# EAGLE board Wk5CADpcb1 (EAGLE 9.7.0)
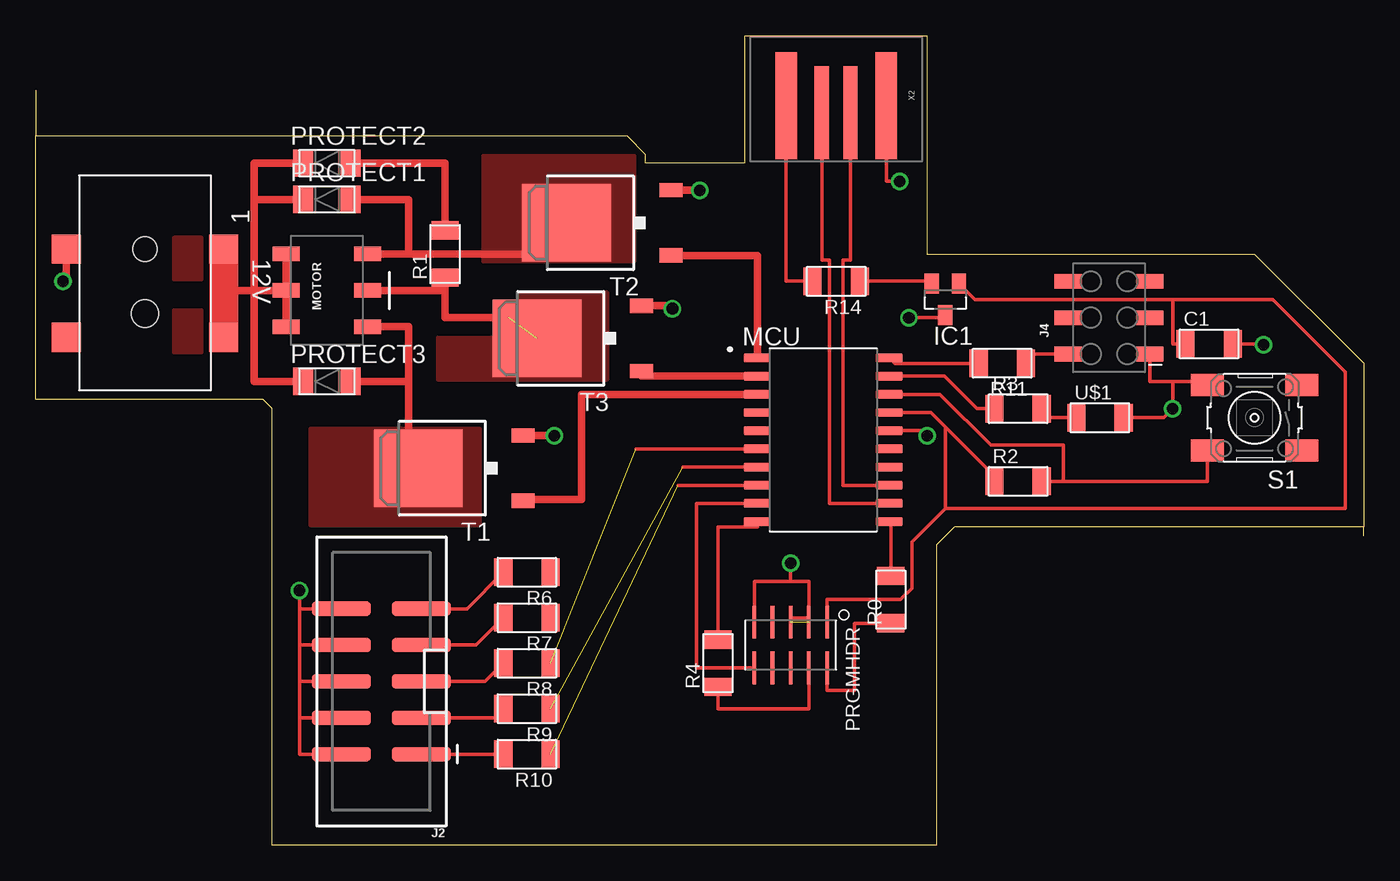
[diagram p0: board, top side]
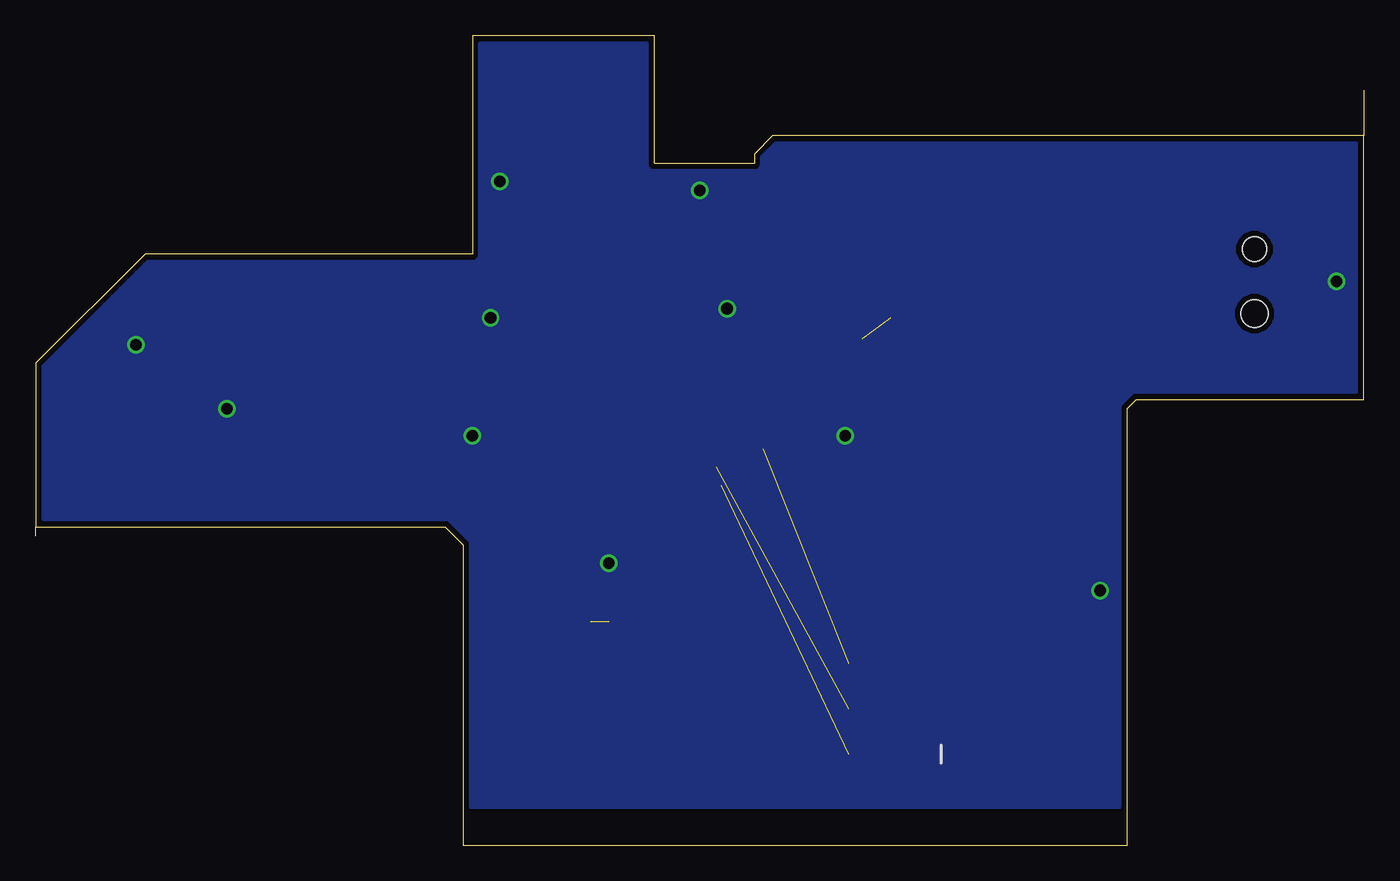
[diagram p1: board, bottom side, seen from below]

Size 92.71 x 56.52 mm. Coordinates in mm from the lower left corner, seen from the top.
Outline: 92.71,22.23 92.71,33.66 85.09,41.28 62.23,41.28 62.23,56.52 49.53,56.52 49.53,47.62 42.55,47.62 42.55,48.26 41.27,49.53 0,49.53
Outline: 92.71,21.59 92.71,22.23
Outline: 92.71,22.23 64.13,22.23 62.87,20.95 62.87,0 16.51,0 16.51,30.48 15.87,31.11 0,31.11 0,49.53
Outline: 0,52.7 0,49.53
Copper layers (1*16): Top 0.035mm / dielectric 1.5mm / Bottom 0.035mm
Design rules "fab": minimum track width 10mil, minimum drill 32mil, track to track 16mil, track to pad 16mil, pad to pad 16mil, via to via 16mil, smd to smd 6mil, copper to edge 16mil, drill to drill 16mil, minimum pad ring 10mil, minimum via ring 8mil, stop-mask expansion 4mil, vias tented up to drill 0mil, thermal gap 16mil

## Footprints (pad centres in the part's own frame; a part is rotated, then mirrored left to right if it is on the bottom)
694108106102 = smd 2.05 x 2.05: 1 -2.25,5.5; 2 -2.25,-5.5; 3 3.9,-5.5; A1 3.9,5.5 | hole 1.7: -2.25,0 | hole 1.9: 2.25,0
C1206FAB = smd 1.27 x 1.905: 1 -1.651,0; 2 1.651,0
SOT23 = smd 1 x 1.4: 1 -0.95,-1.1; 2 0.95,-1.1; 3 0,1.1
2X5-SHROUDED_SMD = smd 4.15 x 1: 1 -2.794,5.08; 2 2.794,5.08; 3 -2.794,2.54; 4 2.794,2.54; 5 -2.794,0; 6 2.794,0; 7 -2.794,-2.54; 8 2.794,-2.54; 9 -2.794,-5.08; 10 2.794,-5.08
2X3_SMD = smd 1.02 x 1.9: 1 -2.54,-2.85; 2 -2.54,2.85; 3 0,-2.85; 4 0,2.85; 5 2.54,-2.85; 6 2.54,2.85
SOIC127P1030X265-20N = smd 1.9 x 0.6: 1 -4.605,5.715; 2 -4.605,4.445; 3 -4.605,3.175; 4 -4.605,1.905; 5 -4.605,0.635; 6 -4.605,-0.635; 7 -4.605,-1.905; 8 -4.605,-3.175; 9 -4.605,-4.445; 10 -4.605,-5.715; 11 4.605,-5.715; 12 4.605,-4.445; 13 4.605,-3.175; 14 4.605,-1.905; 15 4.605,-0.635; 16 4.605,0.635; 17 4.605,1.905; 18 4.605,3.175; 19 4.605,4.445; 20 4.605,5.715
PDI_2X3_SMD = smd 1.02 x 1.9: 1 -2.54,-2.85; 2 -2.54,2.85; 3 0,-2.85; 4 0,2.85; 5 2.54,-2.85; 6 2.54,2.85
2X5_1.27MM_SMD = smd 2.286 x 0.254: 1 -1.6,2.54; 2 1.6,2.54; 3 -1.6,1.27; 4 1.6,1.27; 5 -1.6,0; 6 1.6,0; 7 -1.6,-1.27; 8 1.6,-1.27; 9 -1.6,-2.54; 10 1.6,-2.54
MINI-SMA = smd 1.4 x 1.9: ANODE 1.65,0; KATHODE -1.65,0
R1206FAB = smd 1.27 x 1.905: 1 -1.651,0; 2 1.651,0
6MM_SWITCH = smd 2.286 x 1.524: 1 -3.302,2.286; 2 3.302,2.286; 3 -3.302,-2.286; 4 3.302,-2.286
TO252 = smd 1 x 1.6: 1 -2.28,-4.8; 3 2.28,-4.8 | smd 5.4 x 6.2: 2 0,2.5
LED1206FAB = smd 1.27 x 1.905: 1 -1.651,0; 2 1.651,0
USB-A-PCB = smd 7.5 x 1.5: 5V -0.2,-3.5; GND -0.2,3.5 | smd 6.5 x 1: USB_M 0.3,-1; USB_P 0.3,1

## Placement (x,y rotation side)
12V  [694108106102]  7.62,39.37 270 top
C1  [C1206FAB]  81.91,35 0 top
IC1  [SOT23]  63.5,38.1 180 top
J2  [2X5-SHROUDED_SMD]  24.13,11.43 180 top
J4  [2X3_SMD]  74.93,36.83 90 top
MCU  UC_ATSAMD11D14A-SSUT  [SOIC127P1030X265-20N]  54.97,28.3 0 top
MOTOR  [PDI_2X3_SMD]  20.32,38.73 90 top
PRGMHDR  [2X5_1.27MM_SMD]  52.7,13.97 270 top
PROTECT1  DIODE_SCHOTTKY_CDBM1100-G  [MINI-SMA]  20.32,45.08 0 top
PROTECT2  DIODE_SCHOTTKY_CDBM1100-G  [MINI-SMA]  20.32,47.62 0 top
PROTECT3  DIODE_SCHOTTKY_CDBM1100-G  [MINI-SMA]  20.32,32.39 0 top
R0  0 Ohm  [R1206FAB]  59.69,17.15 90 top
R1  0 Ohm  [R1206FAB]  28.58,41.28 90 top
R2  [R1206FAB]  68.58,25.4 0 top
R3  [R1206FAB]  68.58,30.48 0 top
R4  0 Ohm  [R1206FAB]  47.62,12.7 90 top
R6  [R1206FAB]  34.29,19.05 180 top
R7  [R1206FAB]  34.29,15.88 180 top
R8  [R1206FAB]  34.29,12.7 180 top
R9  [R1206FAB]  34.29,9.52 180 top
R10  [R1206FAB]  34.29,6.35 180 top
R11  [R1206FAB]  67.48,33.66 180 top
R14  [R1206FAB]  55.88,39.37 180 top
S1  [6MM_SWITCH]  85.09,29.84 180 top
T1  [TO252]  29.21,26.32 90 top
T2  [TO252]  39.56,43.45 90 top
T3  [TO252]  37.49,35.38 90 top
U$1  LEDFAB1206  [LED1206FAB]  74.29,29.84 0 top
X2  CONN_USBPCB  [USB-A-PCB]  55.88,51.44 270 top

## Library data of the parts
12V = Connector; CATEGORY: Connector; DESCRIPTION: CONN PWR JACK 2.5X5.5MM SOLDER; MANUFACTURER: Würth Elektronik; MOUNT: SMT; MPN: 694108106102; OPERATING_TEMPERATURE: -40°C to +85°C; PART_STATUS: Active; ROHS_COMPLIANCE: RoHS Compliant; SERIES: WR-DC; SUBCATEGORY: Power Connector; TYPE: Barrel-Right Angled
C1 IC1 MCU PROTECT1-PROTECT3 R0 R1-R4 R6-R11 R14 S1 T1-T3 U$1 X2 = fab
J2 = fab; PROD_ID: CONN-09508
J4 MOTOR = fab; PROD_ID: CONN-11290
PRGMHDR = fab; PACKAGE: 2x5_1.27MM_SMD

## Nets
CLK: PRGMHDR.4 R4.1
COIL1: MOTOR.5 PROTECT1.ANODE T2.2
COIL2: MOTOR.3 R1.1 T3.2
COIL3: MOTOR.1 PROTECT3.ANODE T1.2
GATE1: MCU.1 T2.1
GATE2: MCU.2 T3.1
GATE3: MCU.3 T1.1
GND: 12V.2 C1.2 IC1.3 J2.2 J2.4 J2.6 J2.8 J2.10 J4.1 MCU.16 PRGMHDR.3 PRGMHDR.5 PRGMHDR.9 S1.4 T1.3 T2.3 T3.3 U$1.2 X2.GND
N$1: J4.2 R11.1
N$2: MCU.10 R4.2
N$3: MCU.11 R0.2
N$4: PRGMHDR.2 R0.1
N$5: MCU.13 X2.USB_P
N$6: MCU.12 X2.USB_M
N$7: R14.2 X2.5V
N$8: PROTECT2.ANODE R1.2
N$11: MCU.18 R2.2 S1.2
N$12: MCU.19 R3.1
N$13: R3.2 U$1.1
N$15: J2.9 R6.2
N$16: J2.7 R7.2
N$24: J2.5 R8.2
N$26: J2.3 R9.2
N$28: J2.1 R10.2
N$29: MCU.6 R8.1
N$30: MCU.7 R9.1
N$31: MCU.8 R10.1
N$32: MCU.20 R11.2
N$36: IC1.2 R14.1
RESET: MCU.9 PRGMHDR.10
S$1: R7.1
VCC: 12V.1 12V.A1 MOTOR.2 MOTOR.4 MOTOR.6 PROTECT1.KATHODE PROTECT2.KATHODE PROTECT3.KATHODE
VDD: C1.1 IC1.1 MCU.17 PRGMHDR.1 R2.1

## Tracks (layer width: path | path; a pad name or v marks a point on that pad's centre or on a via)
CLK
  Top 0.254: R4.1 47.62,9.52 53.98,9.52 PRGMHDR.4
COIL1
  Top 0.508: MOTOR.5 26.04,41.28 | 26.04,41.28 26.04,45.08 PROTECT1.ANODE | 26.04,41.28 32.38,41.28 | 32.38,41.28 33.02,41.28 | 32.38,41.28 | 32.38,41.28 36.83,41.28
  pour Top (no thermals): 31.12,40.64 31.12,48.26 41.91,48.26 41.91,40.64
COIL2  (1 unrouted)
  Top 0.508: MOTOR.3 28.58,38.73 | R1.1 28.58,38.73 | 28.58,38.73 28.58,36.83 33.02,36.83
  pour Top (no thermals): 33.66,38.73 40.01,38.73 40.01,32.39 27.94,32.39 27.94,35.56 33.66,35.56
COIL3
  Top 0.508: PROTECT3.ANODE 26.04,32.39 | 26.04,32.39 26.04,36.2 MOTOR.1 | 26.04,32.39 26.04,26.67
  pour Top (no thermals): 29.84,29.21 31.12,29.21 31.12,22.23 31.75,22.23 19.05,22.23 19.05,29.21 31.12,29.21
GATE1
  Top 0.508: T2.1 50.37,41.17 MCU.1
GATE2
  Top 0.508: MCU.2 42.29,32.75 T3.1
GATE3
  Top 0.508: T1.1 34.01,24.13 38.1,24.13 38.1,31.48 MCU.3
GND  (via drill 0.81)  (1 unrouted)
  Top 0.254: J2.2 18.41,6.35 18.41,8.89 | 18.41,8.89 18.41,11.43 | 18.41,11.43 18.41,13.97 | 18.41,13.97 18.41,16.51 | 18.41,16.51 v18.41,17.78 | J2.10 18.41,16.51 | J2.8 18.41,13.97 | J2.6 18.41,11.43 | J2.4 18.41,8.89 | X2.GND 59.38,46.36 v60.32,46.36 | MCU.16 62.23,28.94 v62.23,28.58 | U$1.2 78.74,29.84 v79.38,30.48 79.38,32.39 | PRGMHDR.9 50.16,18.41 52.7,18.41 | PRGMHDR.5 52.7,15.88 53.98,15.88 53.98,18.41 52.7,18.41 | 52.7,18.41 v52.7,19.69 | C1.2 85.72,35 v85.72,34.92 | IC1.3 63.5,36.83 v60.96,36.83 | 79.38,32.39 81.79,32.39 S1.4 | 79.38,32.39 77.78,32.39 J4.1
  Top 0.508: T2.3 46.36,45.73 v46.36,45.72 | T3.3 44.45,37.66 v44.45,37.47 | T1.3 36.2,28.6 v36.2,28.58 | 12V.2 2.12,39.37 v1.9,39.37
  pour Bottom: -1.27,57.15 92.71,57.15 92.71,2.54 -1.27,2.54
N$1
  Top 0.254: R11.1 69.13,34.29 J4.2
N$2
  Top 0.254: MCU.10 50.37,22.23 47.62,22.23 R4.2
N$3
  Top 0.254: MCU.11 59.69,22.48 R0.2
N$4
  Top 0.254: PRGMHDR.2 55.24,10.8 57.15,10.8 57.15,15.49 R0.1
N$5
  Top 0.254: MCU.13 56.36,25.13 56.36,40.86 56.88,40.86 X2.USB_P
N$6
  Top 0.254: MCU.12 55.4,23.86 55.4,40.86 54.88,40.86 X2.USB_M
N$7
  Top 0.254: X2.5V 52.38,39.37 R14.2
N$8
  Top 0.508: PROTECT2.ANODE 28.58,47.62 R1.2
N$11
  Top 0.254: S1.2 81.79,25.4 71.75,25.4 | 71.75,25.4 R2.2 | MCU.18 63.14,31.48 66.67,27.94 71.75,27.94 71.75,25.4
N$12
  Top 0.254: R3.1 65.7,30.48 63.43,32.75 MCU.19
N$13
  Top 0.254: U$1.1 70.87,29.84 R3.2
N$15
  Top 0.254: R6.2 30.1,16.51 J2.9
N$16
  Top 0.254: R7.2 30.73,13.97 J2.7
N$24
  Top 0.254: R8.2 31.37,11.43 J2.5
N$26
  Top 0.254: R9.2 32,8.89 J2.3
N$28
  Top 0.254: R10.2 J2.1
N$29  (1 unrouted)
  Top 0.254: MCU.6 41.91,27.67
N$30  (1 unrouted)
  Top 0.254: 45.18,26.4 MCU.7
N$31  (1 unrouted)
  Top 0.254: MCU.8 44.84,25.13
N$32
  Top 0.254: R11.2 65.82,33.61 59.99,33.61 MCU.20
N$36
  Top 0.254: R14.1 62.55,39.37 IC1.2
RESET
  Top 0.254: MCU.9 46.14,23.86 46.14,12.37 PRGMHDR.10
VCC
  Top 0.508: MOTOR.6 MOTOR.4 | MOTOR.2 MOTOR.4 | MOTOR.4 15.24,38.73 | 13.12,38.73 15.24,38.73 | 15.24,45.08 15.24,38.73 | PROTECT3.KATHODE 15.24,32.39 15.24,38.73 | 15.24,45.08 15.24,47.62 PROTECT2.KATHODE | 15.24,45.08 PROTECT1.KATHODE
  Top 2.032: 12V.1 13.12,38.73 12V.A1
VCC1
  pour Top (no thermals): 13.97,42.55 9.53,42.55 9.53,39.37 13.97,39.37
VCC2
  pour Top (no thermals): 13.97,34.29 9.53,34.29 9.53,37.47 13.97,37.47
VDD
  Top 0.254: R2.1 66.93,25.78 63.5,29.21 | 63.5,29.21 62.5,30.21 MCU.17 | 63.5,23.49 91.44,23.49 91.44,33.02 86.36,38.1 79.38,38.1 | 79.38,38.1 65.55,38.1 IC1.1 | PRGMHDR.1 55.24,17.15 60.38,17.15 61.18,17.94 61.18,21.17 63.5,23.49 | 63.5,29.21 63.5,23.49 | C1.1 79.38,35 79.38,38.1